# Altium PCB STM32F10XV.PCBDOC (part 2 of 2)
Units mm, origin at the board's own origin, x right, y up, seen from the top; angles counter-clockwise.
Board outline 45.75 x 66.52 mm, 2 copper layers (Top Layer, Bottom Layer); 58 components, 99 nets, 365 pads, 37 vias.
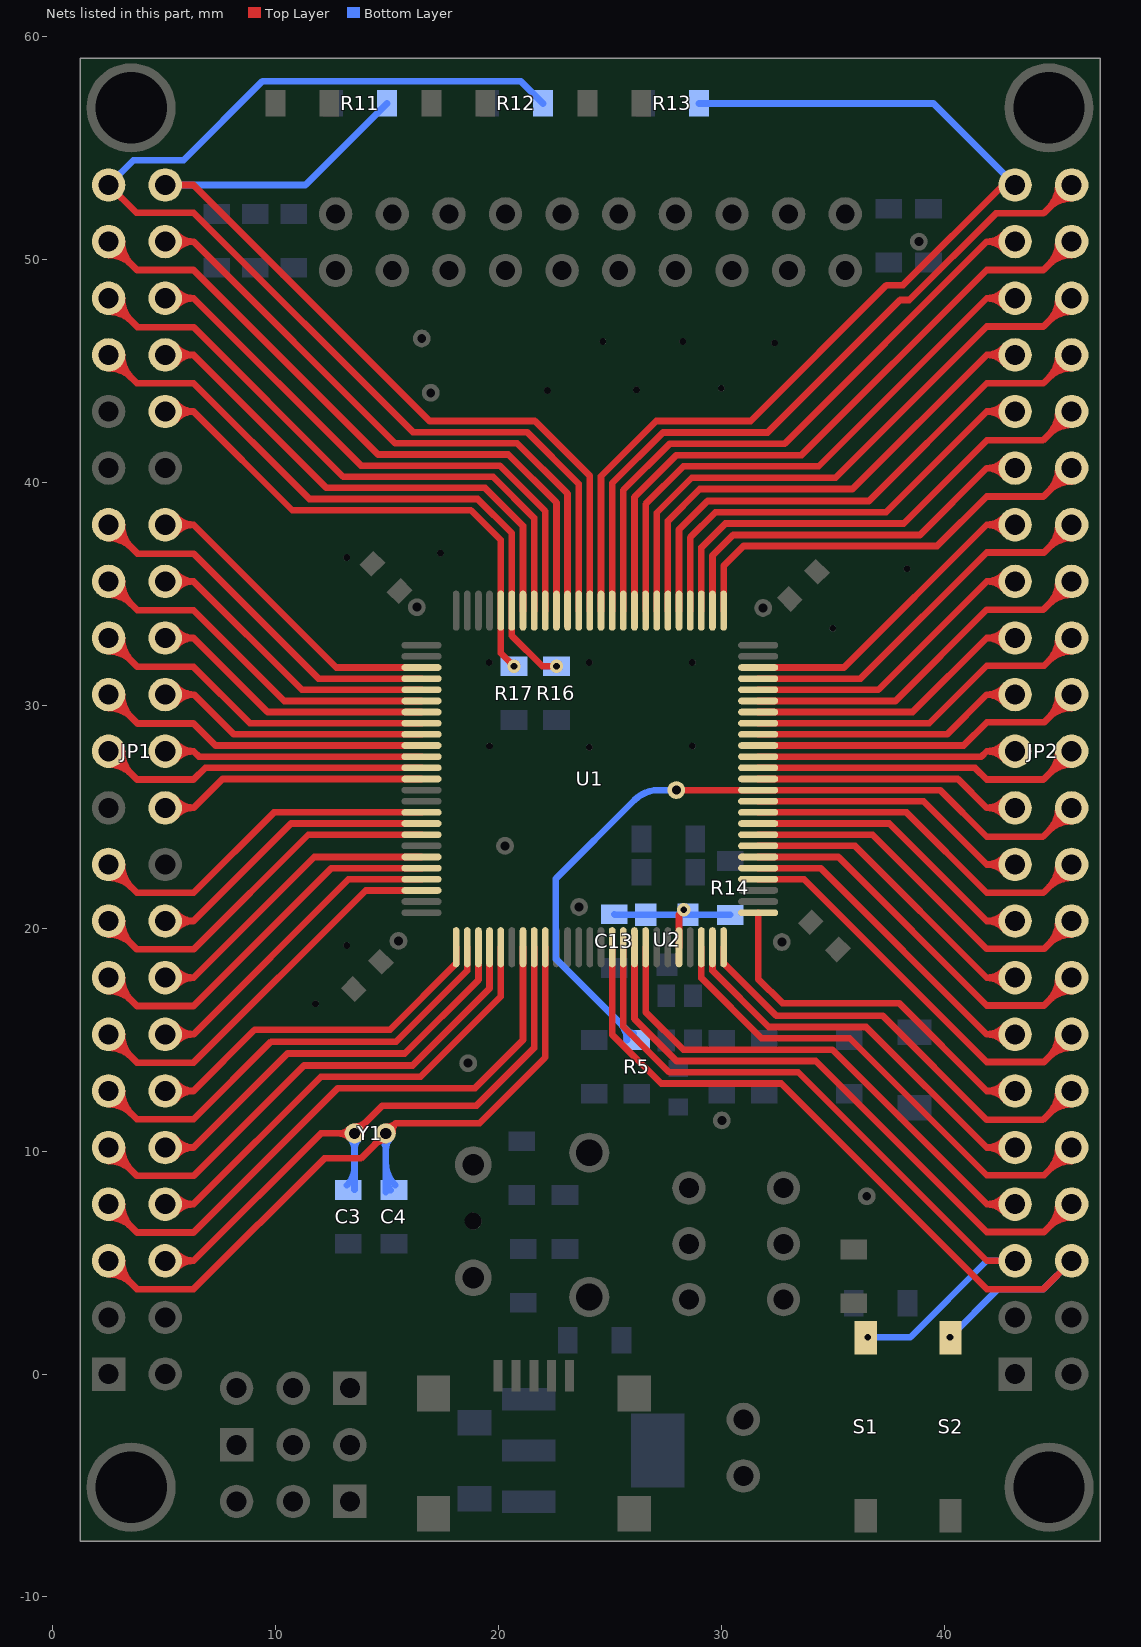
[diagram p2: the nets of this part, all layers, seen from the top]

## Via types
v1: diameter 0.6, hole 0.3, Top Layer to Bottom Layer, tented both sides, 12 vias
v2: diameter 0.6, hole 0.3, Top Layer to Bottom Layer, 8 vias
v3: diameter 0.6, hole 0.3, Top Layer to Bottom Layer, tented top, 8 vias
v4: diameter 0.6, hole 0.3, Top Layer to Bottom Layer, tented bottom, 7 vias
v5: diameter 0.9, hole 0.9, Top Layer to Bottom Layer, 2 vias

## Nets (pads, with @x,y where several pads share a name; then routed paths per layer and width w, separated by ;. In a path a pad name is that pad's centre, name@x,y a point inside that pad or via, vN(x,y) a via of type N, cw(c..) or ccw(c..) an arc to the next point about the centre after c; other vN are vias at no path point) (continued)
PA0: JP2.35 U1.23 | length 24.5
  Top Layer w0.3: U1.23@29.105,19.145 29.105,17.758 31.801,15.062 35.763,15.062 41.91,8.915 44.475,8.915 JP2.35@45.72,10.16 ; JP2.35@45.12,10.16 cw(c43.671,10.16) 44.696,9.136 cw(c45.72,8.111) JP2.35@45.72,9.56
PA1: JP2.36 U1.24 | length 19.8
  Top Layer w0.3: U1.24@29.605,19.145 29.605,18.097 32.131,15.57 36.5,15.57 41.91,10.16 ; JP2.36@42.717,9.779 ccw(c41.91,9.116) 41.91,10.16 ; JP2.36@42.717,10.541 cw(c41.91,11.204) 41.91,10.16 ; JP2.36@43.18,10.16 41.91,10.16
PA2: JP2.33 U1.25 | length 22
  Top Layer w0.3: U1.25@30.105,19.145 30.105,18.435 32.461,16.078 37.236,16.078 41.91,11.405 44.425,11.405 JP2.33@45.72,12.7 ; JP2.33@45.12,12.7 cw(c43.671,12.7) 44.696,11.676 cw(c45.72,10.651) JP2.33@45.72,12.1
PA3: JP2.34 U1.26 | length 18.4
  Top Layer w0.3: U1.26@31.655,20.695 31.655,17.723 32.741,16.637 37.973,16.637 41.91,12.7 ; JP2.34@42.717,12.319 ccw(c41.91,11.656) 41.91,12.7 ; JP2.34@42.717,13.081 cw(c41.91,13.744) 41.91,12.7 ; JP2.34@43.18,12.7 41.91,12.7
PA4: JP2.31 U1.29 | length 20.3
  Top Layer w0.3: U1.29@31.655,22.195 33.71,22.195 41.91,13.995 44.475,13.995 JP2.31@45.72,15.24 ; JP2.31@45.12,15.24 cw(c43.671,15.24) 44.696,14.216 cw(c45.72,13.191) JP2.31@45.72,14.64
PA5: JP2.32 U1.30 | length 16.5
  Top Layer w0.3: U1.30@31.655,22.695 34.455,22.695 41.91,15.24 ; JP2.32@42.717,14.859 ccw(c41.91,14.196) 41.91,15.24 ; JP2.32@42.717,15.621 cw(c41.91,16.284) 41.91,15.24 ; JP2.32@43.18,15.24 41.91,15.24
PA6: JP2.29 U1.31 | length 19.6
  Top Layer w0.3: U1.31@31.655,23.195 35.25,23.195 41.91,16.535 44.475,16.535 JP2.29@45.72,17.78 ; JP2.29@45.12,17.78 cw(c43.671,17.78) 44.696,16.756 cw(c45.72,15.731) JP2.29@45.72,17.18
PA7: JP2.30 U1.32 | length 15.8
  Top Layer w0.3: U1.32@31.655,23.695 35.995,23.695 41.91,17.78 ; JP2.30@42.717,17.399 ccw(c41.91,16.736) 41.91,17.78 ; JP2.30@42.717,18.161 cw(c41.91,18.824) 41.91,17.78 ; JP2.30@43.18,17.78 41.91,17.78
PA8: JP1.5 U1.67 | length 27.3
  Top Layer w0.3: JP1.5@5.055,48.26 6.325,48.26 ; JP1.5@5.518,47.879 cw(c6.325,47.216) 6.325,48.26 ; JP1.5@5.518,48.641 ccw(c6.325,49.304) 6.325,48.26 ; U1.67@22.105,34.245 22.105,38.71 20.062,40.752 13.832,40.752 6.325,48.26
PA9: JP1.6 U1.68 | length 29.6
  Top Layer w0.3: JP1.6@2.515,47.66 cw(c2.515,46.211) 3.539,47.236 cw(c4.563,48.26) JP1.6@3.115,48.26 ; JP1.6@2.515,48.26 3.81,46.965 6.325,46.965 13.037,40.252 19.757,40.252 21.605,38.405 U1.68@21.605,34.245
PA10: JP1.7 U1.69 | length 24.9
  Top Layer w0.3: JP1.7@5.055,45.72 6.325,45.72 ; JP1.7@5.518,45.339 cw(c6.325,44.676) 6.325,45.72 ; JP1.7@5.518,46.101 ccw(c6.325,46.764) 6.325,45.72 ; U1.69@21.105,34.245 21.105,38.049 19.401,39.752 12.292,39.752 6.325,45.72
PA11: JP1.8 R16.2 U1.70 | length 30.8
  Top Layer w0.3: JP1.8@2.515,45.12 cw(c2.515,43.671) 3.539,44.696 cw(c4.563,45.72) JP1.8@3.115,45.72 ; JP1.8@2.515,45.72 3.785,44.45 6.325,44.45 11.522,39.252 19.071,39.252 20.605,37.719 U1.70@20.605,34.245 20.605,33.116 21.971,31.75 v3(22.606,31.75)
PA12: JP1.9 R17.2 U1.71 | length 25.2
  Top Layer w0.3: JP1.9@5.055,43.18 6.325,43.18 ; JP1.9@5.518,42.799 cw(c6.325,42.136) 6.325,43.18 ; JP1.9@5.518,43.561 ccw(c6.325,44.224) 6.325,43.18 ; v3(20.701,31.75) 20.105,32.346 U1.71@20.105,34.245 20.105,37.414 18.766,38.752 10.752,38.752 6.325,43.18
PB0: JP2.25 U1.35 | length 18.4
  Top Layer w0.3: U1.35@31.655,25.195 38.305,25.195 41.91,21.59 44.45,21.59 JP2.25@45.72,22.86 ; JP2.25@45.12,22.86 cw(c43.671,22.86) 44.696,21.836 cw(c45.72,20.811) JP2.25@45.72,22.26
PB1: JP2.26 U1.36 | length 14.5
  Top Layer w0.3: U1.36@31.655,25.695 39.075,25.695 41.91,22.86 ; JP2.26@42.717,22.479 ccw(c41.91,21.816) 41.91,22.86 ; JP2.26@42.717,23.241 cw(c41.91,23.904) 41.91,22.86 ; JP2.26@43.18,22.86 41.91,22.86
PB2: JP2.23 pad.0@27.983,26.195 R5.2 U1.37 | length 39.5
  Top Layer w0.3: pad.0@27.983,26.195 U1.37@31.655,26.195 39.819,26.195 41.91,24.105 44.425,24.105 JP2.23@45.72,25.4 ; JP2.23@45.12,25.4 cw(c43.671,25.4) 44.696,24.376 cw(c45.72,23.351) JP2.23@45.72,24.8
  Bottom Layer w0.3: 25.45,15.749 cw(c24.687,14.986) R5.2@25.766,14.986 ; R5.2@25.818,15.381 ccw(c26.06,15.624) R5.2@26.06,15.281 ; R5.2@26.213,14.986 22.581,18.618 22.581,22.225 26.096,25.74 ; 27.195,26.195 ccw(c27.195,24.64) 26.096,25.74 ; pad.0@27.983,26.195 27.195,26.195 ccw(c27.195,24.64) 26.095,25.74
PB5: JP1.26 U1.91 | length 18.3
  Top Layer w0.3: JP1.26@2.515,22.26 cw(c2.515,20.811) 3.539,21.836 cw(c4.563,22.86) JP1.26@3.115,22.86 ; JP1.26@2.515,22.86 3.785,21.59 6.325,21.59 9.93,25.195 U1.91@16.555,25.195
PB6: JP1.27 U1.92 | length 15.2
  Top Layer w0.3: JP1.27@5.055,20.32 6.325,20.32 ; JP1.27@5.518,19.939 cw(c6.325,19.276) 6.325,20.32 ; JP1.27@5.518,20.701 ccw(c6.325,21.364) 6.325,20.32 ; U1.92@16.555,24.695 10.7,24.695 6.325,20.32
PB7: JP1.28 U1.93 | length 19
  Top Layer w0.3: JP1.28@2.515,19.72 cw(c2.515,18.271) 3.539,19.296 cw(c4.563,20.32) JP1.28@3.115,20.32 ; JP1.28@2.515,20.32 3.785,19.05 6.325,19.05 11.47,24.195 U1.93@16.555,24.195
PB8: JP1.29 U1.95 | length 15.6
  Top Layer w0.3: JP1.29@5.055,17.78 6.325,17.78 ; JP1.29@5.518,17.399 cw(c6.325,16.736) 6.325,17.78 ; JP1.29@5.518,18.161 ccw(c6.325,18.824) 6.325,17.78 ; U1.95@16.555,23.195 11.74,23.195 6.325,17.78
PB9: JP1.30 U1.96 | length 19.4
  Top Layer w0.3: JP1.30@2.515,17.18 cw(c2.515,15.731) 3.539,16.756 cw(c4.563,17.78) JP1.30@3.115,17.78 ; JP1.30@2.515,17.78 3.785,16.51 6.325,16.51 12.51,22.695 U1.96@16.555,22.695
PB10: JP2.13 U1.47 | length 19.2
  Top Layer w0.3: U1.47@31.655,31.195 36.25,31.195 41.91,36.855 44.475,36.855 JP2.13@45.72,38.1 ; JP2.13@45.12,38.1 cw(c43.671,38.1) 44.696,37.076 cw(c45.72,36.051) JP2.13@45.72,37.5
PB11: JP2.14 U1.48 | length 16
  Top Layer w0.3: U1.48@31.655,31.695 35.505,31.695 41.91,38.1 ; JP2.14@42.717,37.719 ccw(c41.91,37.056) 41.91,38.1 ; JP2.14@42.717,38.481 cw(c41.91,39.144) 41.91,38.1 ; JP2.14@43.18,38.1 41.91,38.1
PB12: JP2.11 U1.51 | length 21.7
  Top Layer w0.3: U1.51@30.105,34.245 30.105,36.251 30.996,37.143 39.683,37.143 41.91,39.37 44.45,39.37 JP2.11@45.72,40.64 ; JP2.11@45.12,40.64 cw(c43.671,40.64) 44.696,39.616 cw(c45.72,38.591) JP2.11@45.72,40.04
PB13: JP2.12 U1.52 | length 19.5
  Top Layer w0.3: U1.52@29.605,34.245 29.605,36.717 30.531,37.643 38.913,37.643 41.91,40.64 ; JP2.12@42.717,40.259 ccw(c41.91,39.596) 41.91,40.64 ; JP2.12@42.717,41.021 cw(c41.91,41.684) 41.91,40.64 ; JP2.12@43.18,40.64 41.91,40.64
PB14: JP2.9 U1.53 | length 24.3
  Top Layer w0.3: U1.53@29.105,34.245 29.105,37.08 30.183,38.159 38.184,38.159 41.91,41.885 44.425,41.885 JP2.9@45.72,43.18 ; JP2.9@45.12,43.18 cw(c43.671,43.18) 44.696,42.156 cw(c45.72,41.131) JP2.9@45.72,42.58
PB15: JP2.10 U1.54 | length 22
  Top Layer w0.3: U1.54@28.605,34.245 28.605,37.52 29.743,38.659 37.389,38.659 41.91,43.18 ; JP2.10@42.717,42.799 ccw(c41.91,42.136) 41.91,43.18 ; JP2.10@42.717,43.561 cw(c41.91,44.224) 41.91,43.18 ; JP2.10@43.18,43.18 41.91,43.18
PC0: JP2.39 S2.1 U1.15 | length 36.7
  Top Layer w0.3: U1.15@25.105,19.145 25.105,15.231 27.305,13.03 32.69,13.03 41.91,3.81 44.45,3.81 JP2.39@45.72,5.08
  Bottom Layer w0.3: v4(40.259,1.651) 42.418,3.81 44.45,3.81 JP2.39@45.72,5.08
PC1: JP2.40 S1.1 U1.16 | length 33.5
  Top Layer w0.3: U1.16@25.605,19.145 25.605,15.594 27.661,13.538 33.452,13.538 41.91,5.08 JP2.40@43.18,5.08
  Bottom Layer w0.3: v4(36.576,1.651) 38.481,1.651 41.91,5.08 JP2.40@43.18,5.08
PC2: JP2.37 U1.17 | length 29.6
  Top Layer w0.3: U1.17@26.105,19.145 26.105,15.932 27.991,14.046 34.239,14.046 41.91,6.375 44.475,6.375 JP2.37@45.72,7.62 ; JP2.37@45.12,7.62 cw(c43.671,7.62) 44.696,6.596 cw(c45.72,5.571) JP2.37@45.72,7.02
PC3: JP2.38 U1.18 | length 24.9
  Top Layer w0.3: U1.18@26.605,19.145 26.605,16.245 28.296,14.554 34.976,14.554 41.91,7.62 ; JP2.38@42.717,7.239 ccw(c41.91,6.576) 41.91,7.62 ; JP2.38@42.717,8.001 cw(c41.91,8.664) 41.91,7.62 ; JP2.38@43.18,7.62 41.91,7.62
PC4: JP2.27 U1.33 | length 19
  Top Layer w0.3: U1.33@31.655,24.195 36.79,24.195 41.91,19.075 44.475,19.075 JP2.27@45.72,20.32 ; JP2.27@45.12,20.32 cw(c43.671,20.32) 44.696,19.296 cw(c45.72,18.271) JP2.27@45.72,19.72
PC5: JP2.28 U1.34 | length 15.2
  Top Layer w0.3: U1.34@31.655,24.695 37.535,24.695 41.91,20.32 ; JP2.28@42.717,19.939 ccw(c41.91,19.276) 41.91,20.32 ; JP2.28@42.717,20.701 cw(c41.91,21.364) 41.91,20.32 ; JP2.28@43.18,20.32 41.91,20.32
PC6: JP1.1 R11.1 U1.63 | length 42
  Top Layer w0.3: JP1.1@5.055,53.34 6.325,53.34 16.912,42.752 21.637,42.752 24.105,40.284 U1.63@24.105,34.245
  Bottom Layer w0.3: JP1.1@5.055,53.34 11.34,53.34 R11.1@15,57
PC7: JP1.2 R12.1 U1.64 | length 54.2
  Top Layer w0.3: JP1.2@2.515,53.34 3.759,52.095 6.325,52.095 16.168,42.252 21.281,42.252 23.605,39.929 U1.64@23.605,34.245
  Bottom Layer w0.3: JP1.2@2.515,53.34 3.625,54.45 5.875,54.45 9.425,58 21,58 R12.1@22,57
PC8: JP1.3 U1.65 | length 29.8
  Top Layer w0.3: JP1.3@5.055,50.8 6.325,50.8 ; JP1.3@5.518,50.419 cw(c6.325,49.756) 6.325,50.8 ; JP1.3@5.518,51.181 ccw(c6.325,51.844) 6.325,50.8 ; U1.65@23.105,34.245 23.105,39.497 20.849,41.752 15.372,41.752 6.325,50.8
PC9: JP1.4 U1.66 | length 32.1
  Top Layer w0.3: JP1.4@2.515,50.2 cw(c2.515,48.751) 3.539,49.776 cw(c4.563,50.8) JP1.4@3.115,50.8 ; JP1.4@2.515,50.8 3.785,49.53 6.325,49.53 14.602,41.252 20.443,41.252 22.605,39.091 U1.66@22.605,34.245
PC10: JP1.13 U1.78 | length 16
  Top Layer w0.3: JP1.13@5.055,38.1 6.325,38.1 ; JP1.13@5.518,37.719 cw(c6.325,37.056) 6.325,38.1 ; JP1.13@5.518,38.481 ccw(c6.325,39.144) 6.325,38.1 ; U1.78@16.555,31.695 12.729,31.695 6.325,38.1
PC11: JP1.14 U1.79 | length 19.2
  Top Layer w0.3: JP1.14@2.515,37.5 cw(c2.515,36.051) 3.539,37.076 cw(c4.563,38.1) JP1.14@3.115,38.1 ; JP1.14@2.515,38.1 3.81,36.805 6.325,36.805 11.934,31.195 U1.79@16.555,31.195
PC12: JP1.15 U1.80 | length 15.4
  Top Layer w0.3: JP1.15@5.055,35.56 6.325,35.56 ; JP1.15@5.518,35.179 cw(c6.325,34.516) 6.325,35.56 ; JP1.15@5.518,35.941 ccw(c6.325,36.604) 6.325,35.56 ; U1.80@16.555,30.695 11.189,30.695 6.325,35.56
PC13: JP1.38 U1.7 | length 29.1
  Top Layer w0.3: JP1.38@2.515,7.02 cw(c2.515,5.571) 3.539,6.596 cw(c4.563,7.62) JP1.38@3.115,7.62 ; JP1.38@2.515,7.62 3.785,6.35 6.325,6.35 12.802,12.827 18.948,12.827 21.105,14.983 U1.7@21.105,19.145
PC14: C3.2 JP1.39 U1.8 Y1.1 | length 33.7
  Top Layer w0.3: JP1.39@5.055,5.08 6.325,5.08 ; JP1.39@5.518,4.699 cw(c6.325,4.036) 6.325,5.08 ; JP1.39@5.518,5.461 ccw(c6.325,6.124) 6.325,5.08 ; Y1.1@13.337,10.583 ccw(c12.825,10.071) 12.825,10.795 ccw(c12.825,11.519) Y1.1@13.337,11.007 ; Y1.1@13.549,11.095 ccw(c13.549,11.819) 14.062,11.307 ccw(c14.574,10.795) Y1.1@13.849,10.795 ; U1.8@21.605,19.145 21.605,14.62 19.025,12.04 14.794,12.04 Y1.1@13.549,10.795 12.04,10.795 6.325,5.08
  Bottom Layer w0.3: C3.2@13.203,8.463 ccw(c12.367,9.3) 13.549,9.3 ; Y1.1@13.337,10.583 cw(c12.825,10.071) 13.549,10.071 cw(c14.274,10.071) Y1.1@13.762,10.583 ; C3.2@13.549,8.266 Y1.1@13.549,10.795
PC15: C4.2 JP1.40 U1.9 Y1.2 | length 39.2
  Top Layer w0.3: JP1.40@2.515,4.48 cw(c2.515,3.031) 3.539,4.056 cw(c4.563,5.08) JP1.40@3.115,5.08 ; JP1.40@2.515,5.08 3.785,3.81 6.325,3.81 12.192,9.677 13.832,9.677 15.407,11.252 ; Y1.2@14.649,10.795 cw(c13.925,10.795) 14.437,10.283 cw(c14.949,9.771) Y1.2@14.949,10.495 ; Y1.2@14.974,11.094 ccw(c15.02,11.639) 15.407,11.252 ; Y1.2@15.248,10.82 cw(c15.793,10.866) 15.407,11.252 ; U1.9@22.105,19.145 22.105,14.205 19.152,11.252 15.407,11.252
  Bottom Layer w0.3: Y1.2@14.737,10.583 cw(c14.225,10.071) 14.949,10.071 cw(c15.674,10.071) Y1.2@15.162,10.583 ; C4.2@14.949,8.165 Y1.2@14.949,10.795 ; 14.949,8.759 ccw(c15.668,8.759) C4.2@15.16,8.251 ; 14.949,9.484 ccw(c16.392,9.484) C4.2@15.372,8.463
PD0: JP1.16 U1.81 | length 18.5
  Top Layer w0.3: JP1.16@2.515,34.96 cw(c2.515,33.511) 3.539,34.536 cw(c4.563,35.56) JP1.16@3.115,35.56 ; JP1.16@2.515,35.56 3.81,34.265 6.325,34.265 10.394,30.195 U1.81@16.555,30.195
PD1: JP1.17 U1.82 | length 14.7
  Top Layer w0.3: JP1.17@5.055,33.02 6.325,33.02 ; JP1.17@5.518,32.639 cw(c6.325,31.976) 6.325,33.02 ; JP1.17@5.518,33.401 ccw(c6.325,34.064) 6.325,33.02 ; U1.82@16.555,29.695 9.649,29.695 6.325,33.02
PD2: JP1.18 U1.83 | length 17.9
  Top Layer w0.3: JP1.18@2.515,32.42 cw(c2.515,30.971) 3.539,31.996 cw(c4.563,33.02) JP1.18@3.115,33.02 ; JP1.18@2.515,33.02 3.81,31.725 6.325,31.725 8.854,29.195 U1.83@16.555,29.195
PD3: JP1.19 U1.84 | length 14.1
  Top Layer w0.3: JP1.19@5.055,30.48 6.35,30.48 ; JP1.19@5.512,30.092 cw(c6.35,29.382) 6.35,30.48 ; JP1.19@5.512,30.868 ccw(c6.35,31.578) 6.35,30.48 ; U1.84@16.555,28.695 8.135,28.695 6.35,30.48
PD4: JP1.20 U1.85 | length 17.3
  Top Layer w0.3: JP1.20@2.515,29.88 cw(c2.515,28.431) 3.539,29.456 cw(c4.563,30.48) JP1.20@3.115,30.48 ; JP1.20@2.515,30.48 3.81,29.185 6.325,29.185 7.314,28.195 U1.85@16.555,28.195
PD5: JP1.21 U1.86 | length 13.4
  Top Layer w0.3: JP1.21@5.055,27.94 6.325,27.94 ; JP1.21@5.518,27.559 cw(c6.325,26.896) 6.325,27.94 ; JP1.21@5.518,28.321 ccw(c6.325,28.984) 6.325,27.94 ; U1.86@16.555,27.695 6.569,27.695 6.325,27.94
PD6: JP1.22 U1.87 | length 17.1
  Top Layer w0.3: JP1.22@2.515,27.34 cw(c2.515,25.891) 3.539,26.916 cw(c4.563,27.94) JP1.22@3.115,27.94 ; JP1.22@2.515,27.94 3.785,26.67 6.325,26.67 6.85,27.195 U1.87@16.555,27.195
PD7: JP1.23 U1.88 | length 13.9
  Top Layer w0.3: JP1.23@5.055,25.4 6.325,25.4 ; JP1.23@5.518,25.019 cw(c6.325,24.356) 6.325,25.4 ; JP1.23@5.518,25.781 ccw(c6.325,26.444) 6.325,25.4 ; U1.88@16.555,26.695 7.62,26.695 6.325,25.4
PD8: JP2.7 U1.55 | length 26.8
  Top Layer w0.3: U1.55@28.105,34.245 28.105,37.884 29.388,39.167 36.627,39.167 41.91,44.45 44.45,44.45 JP2.7@45.72,45.72 ; JP2.7@45.12,45.72 cw(c43.671,45.72) 44.696,44.696 cw(c45.72,43.671) JP2.7@45.72,45.12
PD9: JP2.8 U1.56 | length 24.5
  Top Layer w0.3: U1.56@27.605,34.245 27.605,38.273 29.032,39.7 35.89,39.7 41.91,45.72 ; JP2.8@42.717,45.339 ccw(c41.91,44.676) 41.91,45.72 ; JP2.8@42.717,46.101 cw(c41.91,46.764) 41.91,45.72 ; JP2.8@43.18,45.72 41.91,45.72
PD10: JP2.5 U1.57 | length 29.3
  Top Layer w0.3: U1.57@27.105,34.245 27.105,38.636 28.677,40.208 35.128,40.208 41.91,46.99 44.45,46.99 JP2.5@45.72,48.26 ; JP2.5@45.12,48.26 cw(c43.671,48.26) 44.696,47.236 cw(c45.72,46.211) JP2.5@45.72,47.66
PD11: JP2.6 U1.58 | length 27
  Top Layer w0.3: U1.58@26.605,34.245 26.605,39.025 28.304,40.724 34.374,40.724 41.91,48.26 ; JP2.6@42.717,47.879 ccw(c41.91,47.216) 41.91,48.26 ; JP2.6@42.717,48.641 cw(c41.91,49.304) 41.91,48.26 ; JP2.6@43.18,48.26 41.91,48.26
PD12: JP2.3 U1.59 | length 31.7
  Top Layer w0.3: U1.59@26.105,34.245 26.105,39.338 27.991,41.224 33.604,41.224 41.91,49.53 44.45,49.53 JP2.3@45.72,50.8 ; JP2.3@45.12,50.8 cw(c43.671,50.8) 44.696,49.776 cw(c45.72,48.751) JP2.3@45.72,50.2
PD13: JP2.4 U1.60 | length 29.4
  Top Layer w0.3: U1.60@25.605,34.245 25.605,39.651 27.694,41.74 32.85,41.74 41.91,50.8 ; JP2.4@42.717,50.419 ccw(c41.91,49.756) 41.91,50.8 ; JP2.4@42.717,51.181 cw(c41.91,51.844) 41.91,50.8 ; JP2.4@43.18,50.8 41.91,50.8
PD14: JP2.1 U1.61 | length 34.1
  Top Layer w0.3: U1.61@25.105,34.245 25.105,39.964 27.381,42.24 32.08,42.24 38.024,48.184 38.43,48.184 42.316,52.07 44.45,52.07 JP2.1@45.72,53.34 ; JP2.1@45.12,53.34 cw(c43.671,53.34) 44.696,52.316 cw(c45.72,51.291) JP2.1@45.72,52.74
PD15: JP2.2 R13.1 U1.62 | length 45.7
  Top Layer w0.3: U1.62@24.605,34.245 24.605,40.276 27.081,42.752 31.322,42.752 37.419,48.849 38.156,48.849 42.647,53.34 JP2.2@43.18,53.34
  Bottom Layer w0.3: R13.1@29,57 39.52,57 JP2.2@43.18,53.34
PE0: JP1.31 U1.97 | length 16.2
  Top Layer w0.3: JP1.31@5.055,15.24 6.325,15.24 ; JP1.31@5.518,14.859 cw(c6.325,14.196) 6.325,15.24 ; JP1.31@5.518,15.621 ccw(c6.325,16.284) 6.325,15.24 ; U1.97@16.555,22.195 13.28,22.195 6.325,15.24
PE1: JP1.32 U1.98 | length 20
  Top Layer w0.3: JP1.32@2.515,14.64 cw(c2.515,13.191) 3.539,14.216 cw(c4.563,15.24) JP1.32@3.115,15.24 ; JP1.32@2.515,15.24 3.785,13.97 6.325,13.97 14.05,21.695 U1.98@16.555,21.695
PE2: JP1.33 U1.1 | length 18
  Top Layer w0.3: JP1.33@5.055,12.7 6.325,12.7 ; JP1.33@5.518,12.319 cw(c6.325,11.656) 6.325,12.7 ; JP1.33@5.518,13.081 ccw(c6.325,13.744) 6.325,12.7 ; U1.1@18.105,19.145 18.105,18.409 15.138,15.443 9.068,15.443 6.325,12.7
PE3: JP1.34 U1.2 | length 22.7
  Top Layer w0.3: JP1.34@2.515,12.1 cw(c2.515,10.651) 3.539,11.676 cw(c4.563,12.7) JP1.34@3.115,12.7 ; JP1.34@2.515,12.7 3.785,11.43 6.325,11.43 9.804,14.91 15.418,14.91 18.605,18.097 U1.2@18.605,19.145
PE4: JP1.35 U1.3 | length 20.5
  Top Layer w0.3: JP1.35@5.055,10.16 6.325,10.16 ; JP1.35@5.518,9.779 cw(c6.325,9.116) 6.325,10.16 ; JP1.35@5.518,10.541 ccw(c6.325,11.204) 6.325,10.16 ; U1.3@19.105,19.145 19.105,17.682 15.799,14.376 10.541,14.376 6.325,10.16
PE5: JP1.36 U1.4 | length 25.2
  Top Layer w0.3: JP1.36@2.515,9.56 cw(c2.515,8.111) 3.539,9.136 cw(c4.563,10.16) JP1.36@3.115,10.16 ; JP1.36@2.515,10.16 3.785,8.89 6.325,8.89 11.278,13.843 16.154,13.843 19.605,17.293 U1.4@19.605,19.145
PE6: JP1.37 U1.5 | length 23
  Top Layer w0.3: JP1.37@5.055,7.62 6.325,7.62 ; JP1.37@5.518,7.239 cw(c6.325,6.576) 6.325,7.62 ; JP1.37@5.518,8.001 ccw(c6.325,8.664) 6.325,7.62 ; U1.5@20.105,19.145 20.105,16.93 16.51,13.335 12.04,13.335 6.325,7.62
PE7: JP2.24 U1.38 | length 13.9
  Top Layer w0.3: U1.38@31.655,26.695 40.615,26.695 41.91,25.4 ; JP2.24@42.717,25.019 ccw(c41.91,24.356) 41.91,25.4 ; JP2.24@42.717,25.781 cw(c41.91,26.444) 41.91,25.4 ; JP2.24@43.18,25.4 41.91,25.4
PE8: JP2.21 U1.39 | length 17.1
  Top Layer w0.3: U1.39@31.655,27.195 41.385,27.195 41.91,26.67 44.45,26.67 JP2.21@45.72,27.94 ; JP2.21@45.12,27.94 cw(c43.671,27.94) 44.696,26.916 cw(c45.72,25.891) JP2.21@45.72,27.34
PE9: JP2.22 U1.40 | length 13.5
  Top Layer w0.3: U1.40@31.655,27.695 41.665,27.695 41.91,27.94 ; JP2.22@42.717,27.559 ccw(c41.91,26.896) 41.91,27.94 ; JP2.22@42.717,28.321 cw(c41.91,28.984) 41.91,27.94 ; JP2.22@43.18,27.94 41.91,27.94
PE10: JP2.19 U1.41 | length 17.3
  Top Layer w0.3: U1.41@31.655,28.195 40.87,28.195 41.91,29.235 44.475,29.235 JP2.19@45.72,30.48 ; JP2.19@45.12,30.48 cw(c43.671,30.48) 44.696,29.456 cw(c45.72,28.431) JP2.19@45.72,29.88
PE11: JP2.20 U1.42 | length 14.1
  Top Layer w0.3: U1.42@31.655,28.695 40.125,28.695 41.91,30.48 ; JP2.20@42.717,30.099 ccw(c41.91,29.436) 41.91,30.48 ; JP2.20@42.717,30.861 cw(c41.91,31.524) 41.91,30.48 ; JP2.20@43.18,30.48 41.91,30.48
PE12: JP2.17 U1.43 | length 17.9
  Top Layer w0.3: U1.43@31.655,29.195 39.33,29.195 41.91,31.775 44.475,31.775 JP2.17@45.72,33.02 ; JP2.17@45.12,33.02 cw(c43.671,33.02) 44.696,31.996 cw(c45.72,30.971) JP2.17@45.72,32.42
PE13: JP2.18 U1.44 | length 14.7
  Top Layer w0.3: U1.44@31.655,29.695 38.585,29.695 41.91,33.02 ; JP2.18@42.717,32.639 ccw(c41.91,31.976) 41.91,33.02 ; JP2.18@42.717,33.401 cw(c41.91,34.064) 41.91,33.02 ; JP2.18@43.18,33.02 41.91,33.02
PE14: JP2.15 U1.45 | length 18.6
  Top Layer w0.3: U1.45@31.655,30.195 37.815,30.195 41.91,34.29 44.45,34.29 JP2.15@45.72,35.56 ; JP2.15@45.12,35.56 cw(c43.671,35.56) 44.696,34.536 cw(c45.72,33.511) JP2.15@45.72,34.96
PE15: JP2.16 U1.46 | length 15.4
  Top Layer w0.3: U1.46@31.655,30.695 37.045,30.695 41.91,35.56 ; JP2.16@42.717,35.179 ccw(c41.91,34.516) 41.91,35.56 ; JP2.16@42.717,35.941 cw(c41.91,36.604) 41.91,35.56 ; JP2.16@43.18,35.56 41.91,35.56
VREF+: C13.1 R14.2 U1.21 U2.1 U2.2 | length 7
  Top Layer w0.3: U1.21@28.105,19.145 28.105,20.612 v3(28.321,20.828)
  Bottom Layer w0.3: C13.1@25.197,20.625 25.215,20.607 U2.1@26.609,20.607 26.616,20.599 R14.2@30.404,20.599
pads on no net: CZ1.11 CZ1.17 CZ1.19 MiniUSB.4 U1.73
copper on no net:
  other v5: 19.39,-3.675 23.79,-3.675

## Polygon pours and split planes (outlines as drawn)
GND on Top Layer "Top Layer-No Net" (solid, remove dead copper, pour order 36): 28.033,23.373 28.033,14.605 41.114,14.605 41.368,14.224 41.241,14.415 41.241,23.373
GND on Top Layer "Top Layer-No Net" (solid, remove dead copper, pour order 26): 29.21,38.1 29.21,31.75 29.235,31.775 41.91,31.775 41.91,38.1
GND on Top Layer "Top Layer-No Net" (solid, remove dead copper, pour order 24): 20.105,33.02 8.89,33.02 8.89,39.37 20.32,39.37
GND on Top Layer "Top Layer-No Net" (solid, remove dead copper, pour order 20): 17.78,21.59 10.135,21.59 10.135,15.265 10.16,15.24 17.78,15.24
GND on Top Layer "Top Layer-No Net" (solid, remove dead copper, pour order 16): 42.037,-7.493 6.477,-7.493 6.477,8.89 42.037,8.89
GND on Top Layer "Top Layer-GND 1" (hatched 90Degree grid 0.2 track 0.3, remove dead copper, pour order 12): 7.645,56 7.645,43.434 40.616,43.434 40.616,55.781 7.645,55.781
GND on Bottom Layer "Top Layer-No Net" (solid, remove dead copper, pour order 34): 6.35,23.042 6.35,2.54 42.027,2.54 42.027,22.959 42.291,23.114
GND on Bottom Layer "Top Layer-No Net" (solid, remove dead copper, pour order 32): 6.35,3.937 6.35,-7.493 41.299,-7.493 42.037,-7.341 42.037,3.937
GND on Bottom Layer "Top Layer-No Net" (solid, remove dead copper, pour order 28): 6.35,46.99 41.91,46.99 41.91,21.209 6.35,21.209

## Keep-outs
Keep-Out Layer:
  the board outline again, w0.2

## Other copper
Top Layer:
  rectangle net GND: 1.651,1.651 8.509,3.429
  rectangle net GND: 1.651,-1.016 6.731,1.651
Bottom Layer:
  rectangle net GND: 14.351,51.435 36.449,52.705
  rectangle net GND: 1.651,-1.016 6.604,3.429

## Silkscreen, mask and mechanical layers (free items; w line width, h text height)
Top Overlay:
  text "UESTC ICKX" at 31.75,56.591 h1.2
  text "C07" at 6.248,44.647 h1.2
  text "C06" at 9.703,44.647 h1.2
  text "D15" at 35.509,44.647 h1.2
  text "D14" at 38.964,44.647 h1.2
  text "C09" at 6.274,43.127 h1.2
  text "C08" at 9.728,43.127 h1.2
  text "D13" at 35.535,43.127 h1.2
  text "D12" at 38.989,43.127 h1.2
  text "STM32 Minimal Circuit" at 14.173,42.621 h1.3
  text "A09" at 6.274,41.607 h1.2
  text "A08" at 9.728,41.607 h1.2
  text "D11" at 35.535,41.607 h1.2
  text "D10" at 38.989,41.607 h1.2
  text "v1.2" at 30.836,40.564 h1.1
  text "A11" at 6.274,40.087 h1.2
  text "A10" at 9.728,40.087 h1.2
  text "D09" at 35.535,40.087 h1.2
  text "D08" at 38.989,40.087 h1.2
  text "A13" at 6.274,38.567 h1.2
  text "A12" at 9.728,38.567 h1.2
  text "B15" at 35.535,38.567 h1.2
  text "B14" at 38.989,38.567 h1.2
  text "A15" at 6.274,37.047 h1.2
  text "A14" at 9.728,37.047 h1.2
  text "B13" at 35.535,37.047 h1.2
  text "B12" at 38.989,37.047 h1.2
  text "C11" at 6.274,35.527 h1.2
  text "C10" at 9.728,35.527 h1.2
  text "B11" at 35.535,35.527 h1.2
  text "B10" at 38.989,35.527 h1.2
  text "D00" at 6.274,34.007 h1.2
  text "C12" at 9.728,34.007 h1.2
  text "E15" at 35.535,34.007 h1.2
  text "E14" at 38.989,34.007 h1.2
  text "D02" at 6.274,32.487 h1.2
  text "D01" at 9.728,32.487 h1.2
  text "E13" at 35.535,32.487 h1.2
  text "E12" at 38.989,32.487 h1.2
  text "D04" at 6.274,29.947 h1.2
  text "D03" at 9.728,29.947 h1.2
  text "E11" at 35.535,29.947 h1.2
  text "E10" at 38.989,29.947 h1.2
  text "Designed by" at 19.177,29.388 h1.1
  text "MartianZ" at 23.089,27.508 h1.1
  text "D06" at 6.274,27.407 h1.2
  text "D05" at 9.728,27.407 h1.2
  text "E09" at 35.535,27.407 h1.2
  text "E08" at 38.989,27.407 h1.2
  text "B03" at 6.274,24.867 h1.2
  text "D07" at 9.728,24.867 h1.2
  text "E07" at 35.535,24.867 h1.2
  text "B02" at 38.989,24.867 h1.2
  text "B05" at 6.274,22.327 h1.2
  text "B04" at 9.728,22.327 h1.2
  text "B01" at 35.535,22.327 h1.2
  text "B00" at 38.989,22.327 h1.2
  text "B07" at 6.274,19.787 h1.2
  text "B06" at 9.728,19.787 h1.2
  text "C05" at 35.535,19.787 h1.2
  text "C04" at 38.989,19.787 h1.2
  text "B09" at 6.274,17.247 h1.2
  text "B08" at 9.728,17.247 h1.2
  text "A07" at 35.535,17.247 h1.2
  text "A06" at 38.989,17.247 h1.2
  text "E01" at 6.274,14.707 h1.2
  text "E00" at 9.728,14.707 h1.2
  text "A05" at 35.535,14.707 h1.2
  text "A04" at 38.989,14.707 h1.2
  text "E03" at 6.274,12.167 h1.2
  text "E02" at 9.728,12.167 h1.2
  text "A03" at 35.535,12.167 h1.2
  text "A02" at 38.989,12.167 h1.2
  text "0--1" at 31.902,10.82 h1 r90
  text "BOOT0" at 29.185,10.389 h1 r90
  text "BOOT1" at 33.376,10.389 h1 r90
  text "RST" at 26.949,10.338 h1.2 r90
  text "E05" at 6.274,9.627 h1.2
  text "E04" at 9.728,9.627 h1.2
  text "A01" at 35.535,9.627 h1.2
  text "A00" at 38.989,9.627 h1.2
  text "C13" at 6.274,7.087 h1.2
  text "E06" at 9.728,7.087 h1.2
  text "C03" at 35.56,7.087 h1.2
  text "C02" at 38.989,7.087 h1.2
  text "C15" at 6.274,4.547 h1.2
  text "C14" at 9.728,4.547 h1.2
  text "C01" at 37.008,4.547 h1
  text "C00" at 39.345,4.547 h1
  text "V" at 37.846,2.667 h1.2
  text "B" at 39.878,2.667 h1.2
  text "GND" at 6.274,2.007 h1.2
Top Solder:
  rectangle: 12.827,2.972 15.697,5.004